# EAGLE board aleph-interface121120 (EAGLE 5.11)
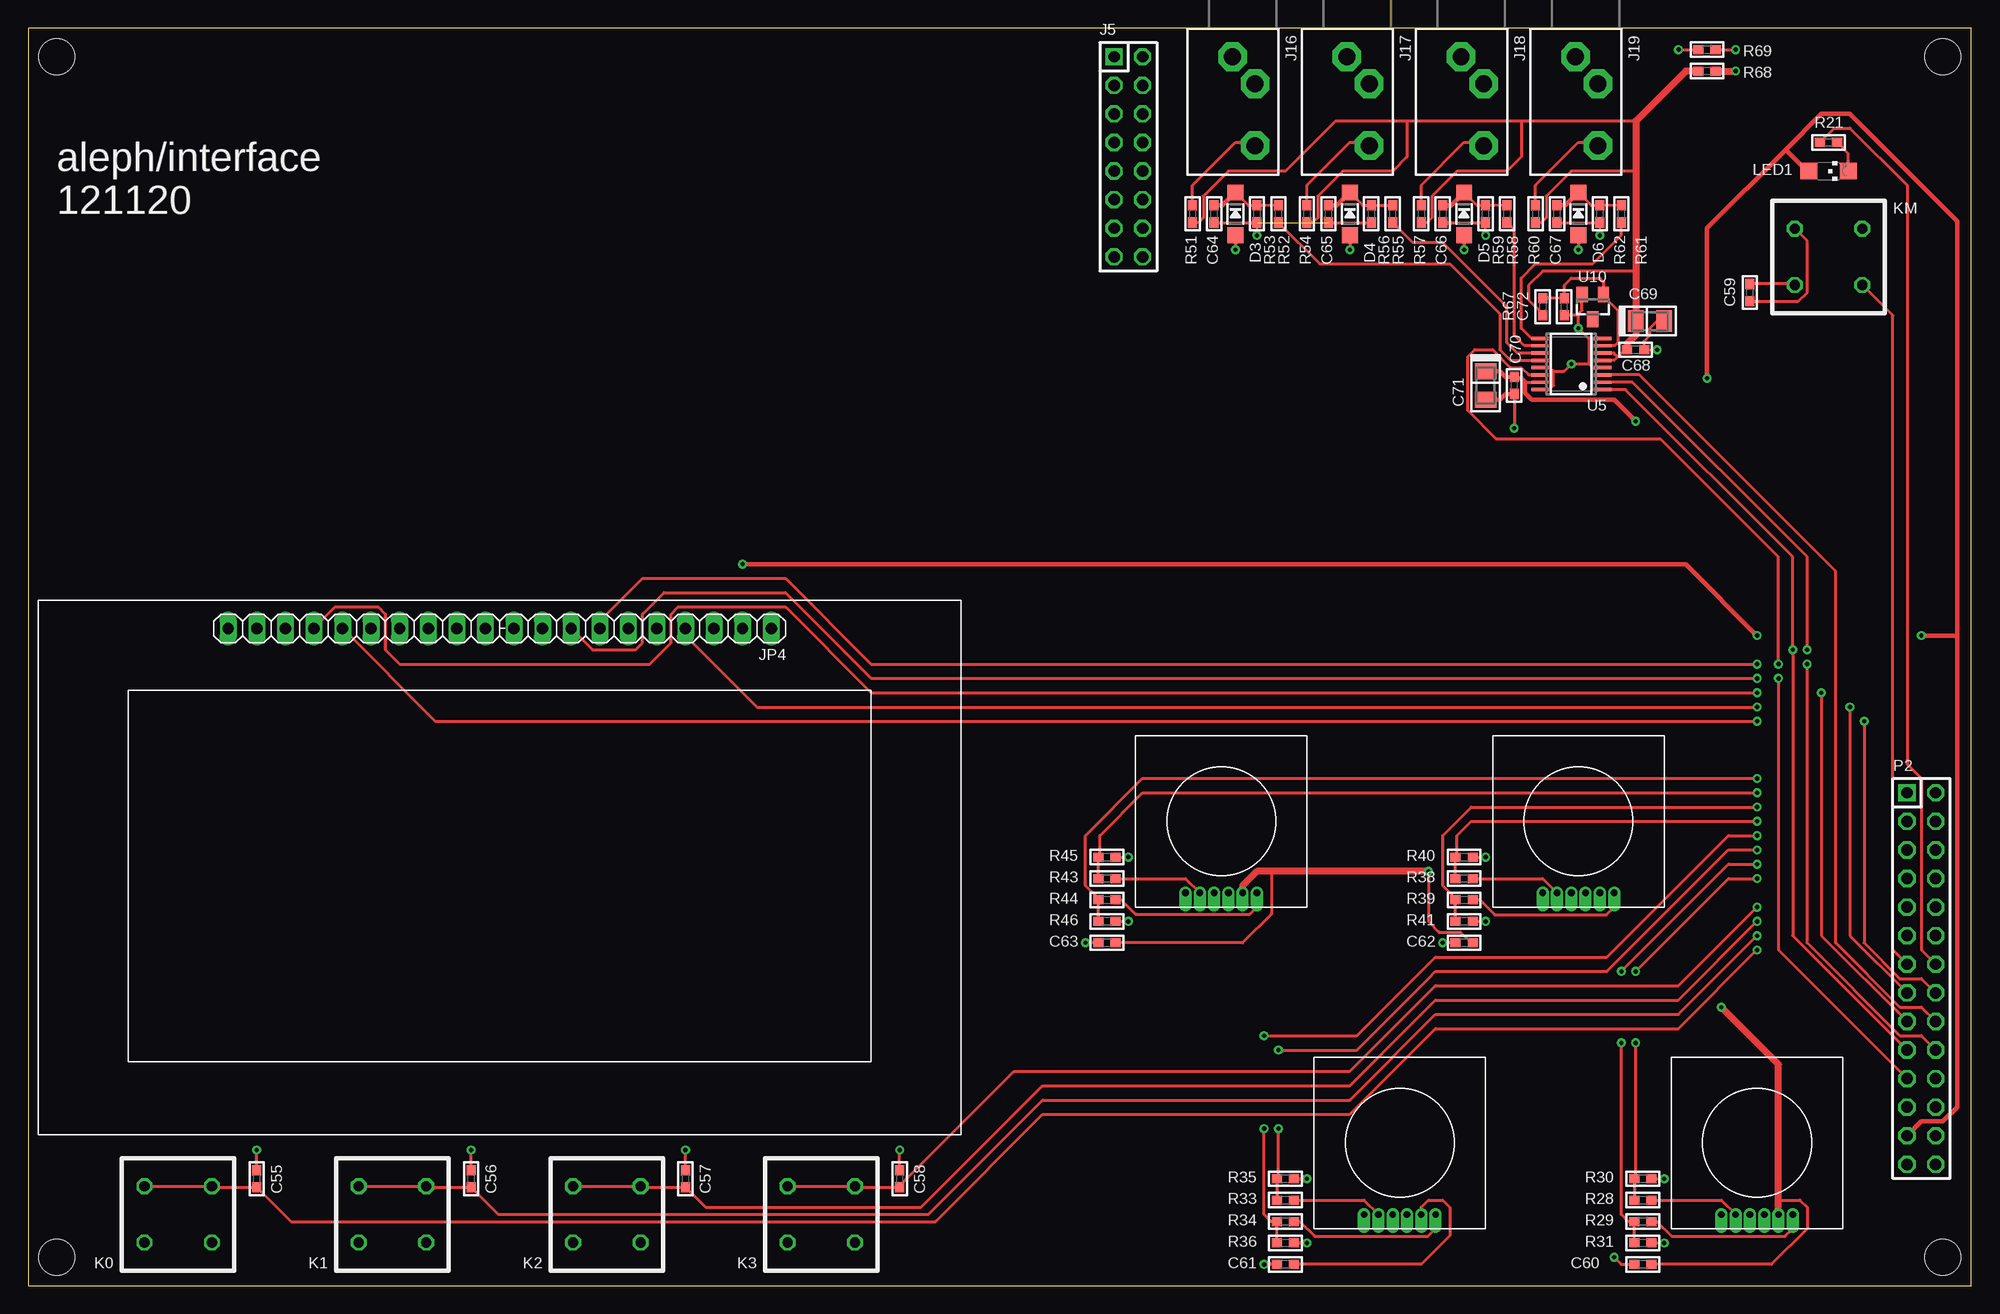
[diagram p0: board, top side]
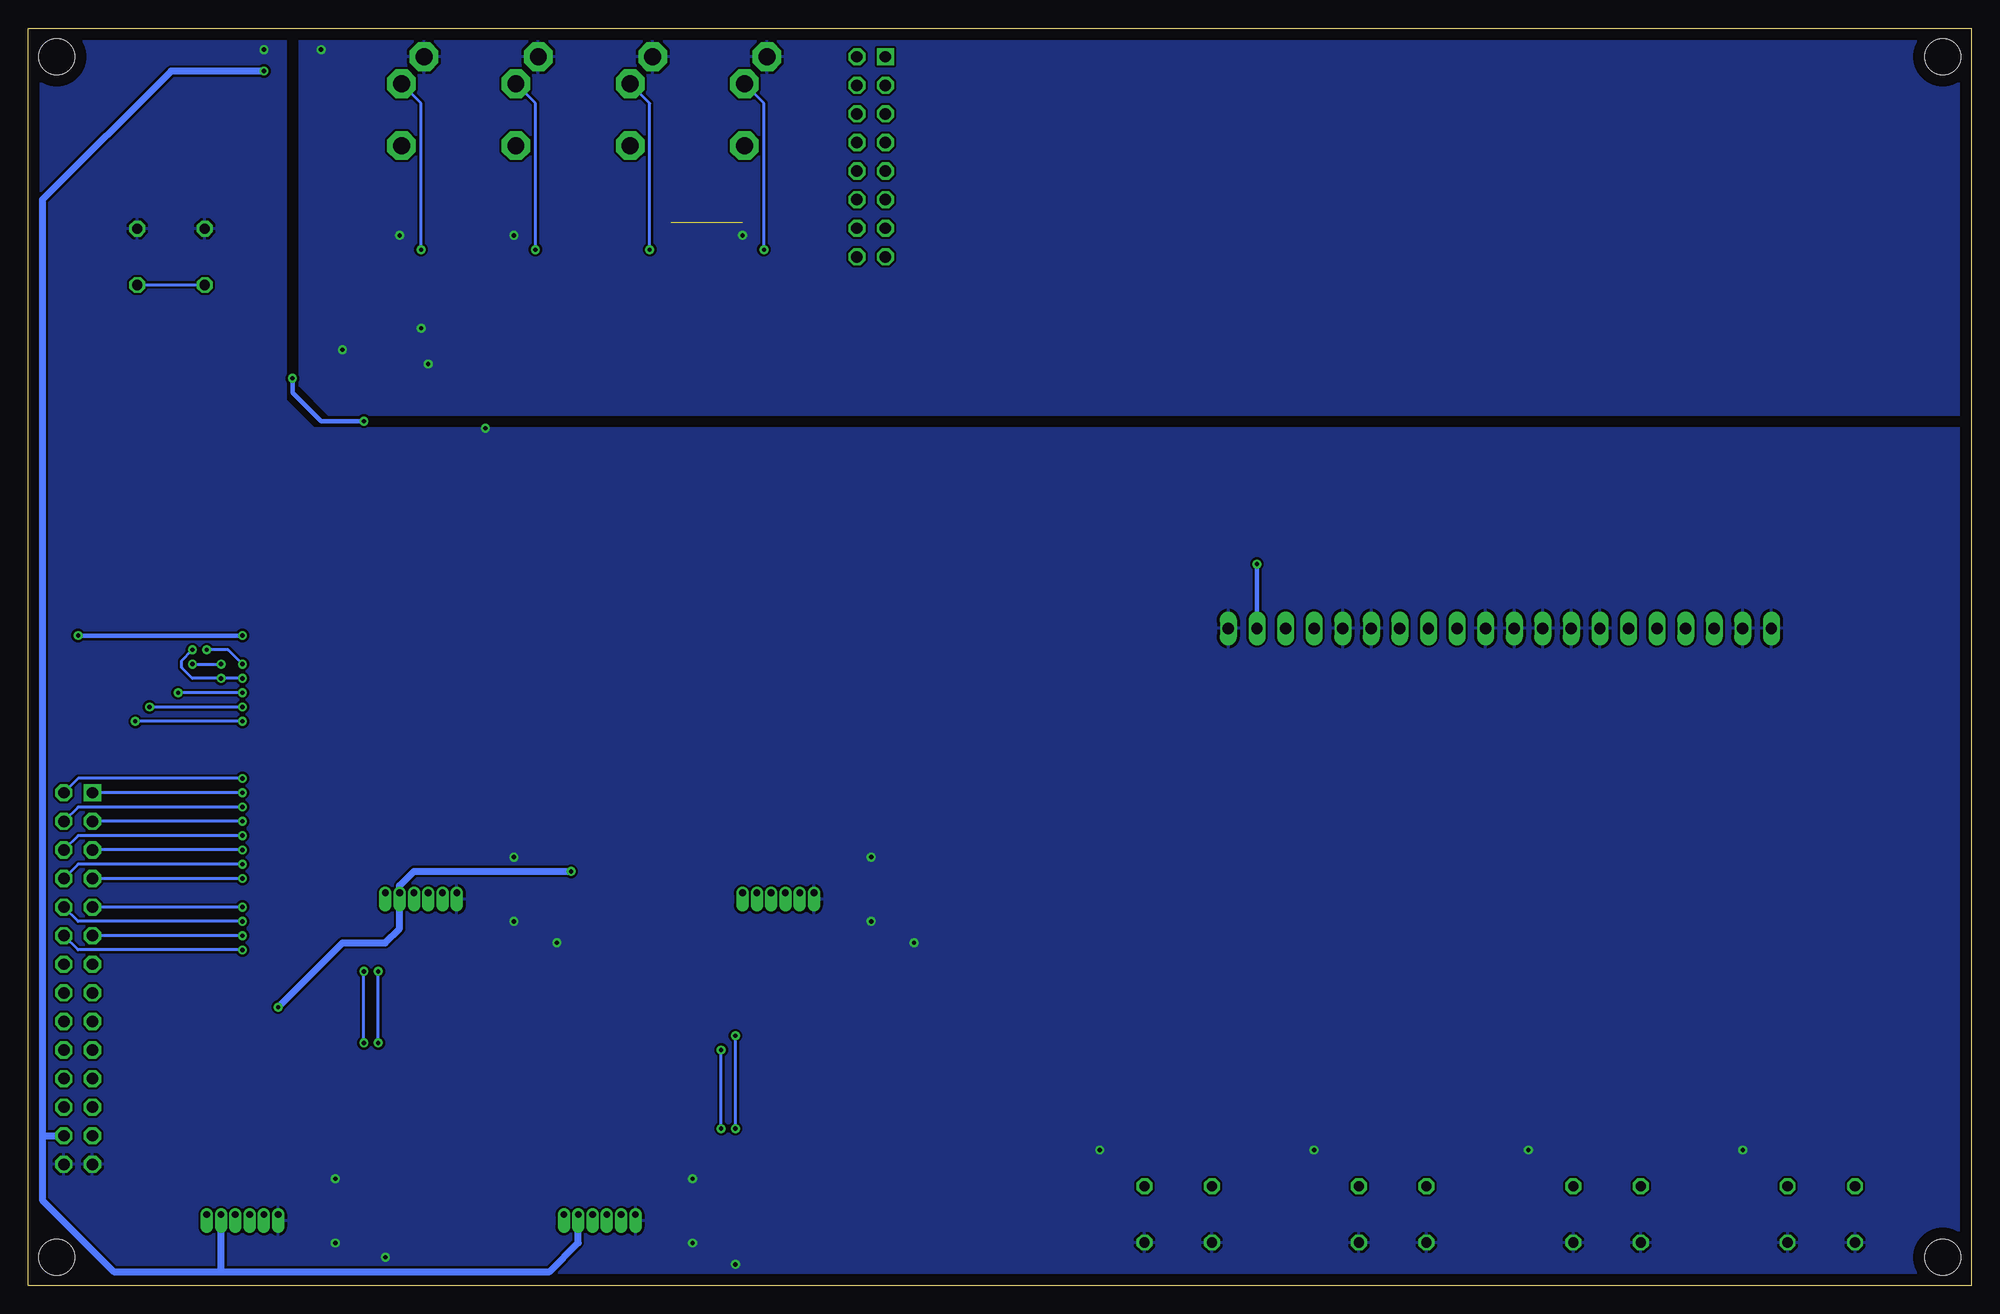
[diagram p1: board, bottom side, seen from below]

Size 172.72 x 111.76 mm. Coordinates in mm from the lower left corner, seen from the top.
Outline: 0,0 172.72,0 172.72,111.76 0,111.76 0,0
Copper layers (1*16): Top 0.035mm / dielectric 1.5mm / Bottom 0.035mm
Design rules "default": minimum track width 10mil, minimum drill 24mil, track to track 8mil, track to pad 8mil, pad to pad 8mil, via to via 8mil, smd to smd 8mil, copper to edge 40mil, drill to drill 8mil, minimum pad ring 10mil, minimum via ring 8mil, stop-mask expansion 4mil, vias tented up to drill 0mil, thermal gap 10mil
Holes 3.2 mm at 2.54,2.54 2.54,109.22 170.18,109.22 170.18,2.54

## Footprints (pad centres in the part's own frame; a part is rotated, then mirrored left to right if it is on the bottom)
C0603 = smd 0.9 x 0.8: 1 -0.762,0; 2 0.762,0
C1206/T = smd 1.4 x 1.9: + 1.27,0; - -1.27,0
SOD123 = smd 1.4 x 1.4: A 1.905,0; C -1.905,0
DIL-100-2X08 = drill 1.016 square: 1 -8.89,-1.27 | drill 1.016 octagon: 2 -8.89,1.27; 3 -6.35,-1.27; 4 -6.35,1.27; 5 -3.81,-1.27; 6 -3.81,1.27; 7 -1.27,-1.27; 8 -1.27,1.27; 9 1.27,-1.27; 10 1.27,1.27; 11 3.81,-1.27; 12 3.81,1.27; 13 6.35,-1.27; 14 6.35,1.27; 15 8.89,-1.27; 16 8.89,1.27
SJ1-3533NG = drill 1.5 pad 2.54 octagon: 1 0,-0.9; 2 2.4,1.1; 3 7.9,1.1
1X20 = drill 1.016 long: 1 -24.13,0; 2 -21.59,0; 3 -19.05,0; 4 -16.51,0; 5 -13.97,0; 6 -11.43,0; 7 -8.89,0; 8 -6.35,0; 9 -3.81,0; 10 -1.27,0; 11 1.27,0; 12 3.81,0; 13 6.35,0; 14 8.89,0; 15 11.43,0; 16 13.97,0; 17 16.51,0; 18 19.05,0; 19 21.59,0; 20 24.13,0
PVA1 = drill 0.9 octagon: 1 -3,-2.5; 2 -3,2.5; 3 3,2.5; 4 3,-2.5
CHIPLED_1206 = smd 1.5 x 1.5: A 0,-1.75; C 0,1.75
DIL-100-2X14 = drill 1.016 square: 1 -16.51,-1.27 | drill 1.016 octagon: 2 -16.51,1.27; 3 -13.97,-1.27; 4 -13.97,1.27; 5 -11.43,-1.27; 6 -11.43,1.27; 7 -8.89,-1.27; 8 -8.89,1.27; 9 -6.35,-1.27; 10 -6.35,1.27; 11 -3.81,-1.27; 12 -3.81,1.27; 13 -1.27,-1.27; 14 -1.27,1.27; 15 1.27,-1.27; 16 1.27,1.27; 17 3.81,-1.27; 18 3.81,1.27; 19 6.35,-1.27; 20 6.35,1.27; 21 8.89,-1.27; 22 8.89,1.27; 23 11.43,-1.27; 24 11.43,1.27; 25 13.97,-1.27; 26 13.97,1.27; 27 16.51,-1.27; 28 16.51,1.27
R0603 = smd 0.9 x 0.8: 1 -0.762,0; 2 0.762,0
TSSOP16 = smd 0.3 x 1.5: 1 -2.275,-2.8; 2 -1.625,-2.8; 3 -0.975,-2.8; 4 -0.325,-2.8; 5 0.325,-2.8; 6 0.975,-2.8; 7 1.625,-2.8; 8 2.275,-2.8; 9 2.275,2.8; 10 1.625,2.8; 11 0.975,2.8; 12 0.325,2.8; 13 -0.325,2.8; 14 -0.975,2.8; 15 -1.625,2.8; 16 -2.275,2.8
SOT23 = smd 1 x 1.4: 1 -0.95,-1.1; 2 0.95,-1.1; 3 0,1.1
BOURNS-EM14 = drill 0.6 pad 0.813 offset: P$1 -3.175,-6.35; P$2 -1.905,-6.35; P$3 -0.635,-6.35; P$4 0.635,-6.35; P$5 1.905,-6.35; P$6 3.175,-6.35

## Placement (x,y rotation side)
C55  100n  [C0603]  20.32,9.53 270 top
C56  100n  [C0603]  39.37,9.53 270 top
C57  100n  [C0603]  58.42,9.53 270 top
C58  100n  [C0603]  77.47,9.53 270 top
C59  100n  [C0603]  153.03,88.27 90 top
C60  100n  [C0603]  143.51,1.91 0 top
C61  100n  [C0603]  111.76,1.91 0 top
C62  100n  [C0603]  127.64,30.48 0 top
C63  100n  [C0603]  95.89,30.48 0 top
C64  10n  [C0603]  105.41,95.25 270 top
C65  10n  [C0603]  115.57,95.25 270 top
C66  10n  [C0603]  125.73,95.25 270 top
C67  10n  [C0603]  135.89,95.25 270 top
C68  100n  [C0603]  142.88,83.19 180 top
C69  10u  [C1206/T]  144.15,85.72 180 top
C70  100n  [C0603]  132.08,80.01 90 top
C71  10u  [C1206/T]  129.54,80.01 90 top
C72  100n  [C0603]  136.53,87 90 top
D3  1N4148W-7  [SOD123]  107.31,95.25 270 top
D4  1N4148W-7  [SOD123]  117.47,95.25 270 top
D5  1N4148W-7  [SOD123]  127.64,95.25 270 top
D6  1N4148W-7  [SOD123]  137.79,95.25 270 top
J5  F-2X08-DIL-100  [DIL-100-2X08]  97.79,100.33 270 top
J16  SJ1-3533NG  [SJ1-3533NG]  107.95,109.22 270 top
J17  SJ1-3533NG  [SJ1-3533NG]  118.11,109.22 270 top
J18  SJ1-3533NG  [SJ1-3533NG]  128.27,109.22 270 top
J19  SJ1-3533NG  [SJ1-3533NG]  138.43,109.22 270 top
JP4  OLED  [1X20]  41.91,58.42 180 top
K0  PVA1  [PVA1]  13.34,6.35 180 top
K1  PVA1  [PVA1]  32.38,6.35 180 top
K2  PVA1  [PVA1]  51.44,6.35 180 top
K3  PVA1  [PVA1]  70.48,6.35 180 top
KM  PVA1  [PVA1]  160.02,91.44 0 top
LED1  [CHIPLED_1206]  160.02,99.06 270 top
P2  M-2X14-DIL-100  [DIL-100-2X14]  168.28,27.3 270 top
R21  150  [R0603]  160.02,101.6 0 top
R28  470  [R0603]  143.51,7.62 180 top
R29  470  [R0603]  143.51,5.71 180 top
R30  910  [R0603]  143.51,9.53 180 top
R31  910  [R0603]  143.51,3.81 180 top
R33  470  [R0603]  111.76,7.62 180 top
R34  470  [R0603]  111.76,5.71 180 top
R35  910  [R0603]  111.76,9.53 180 top
R36  910  [R0603]  111.76,3.81 180 top
R38  470  [R0603]  127.64,36.2 180 top
R39  470  [R0603]  127.64,34.29 180 top
R40  910  [R0603]  127.64,38.1 180 top
R41  910  [R0603]  127.64,32.38 180 top
R43  470  [R0603]  95.89,36.2 180 top
R44  470  [R0603]  95.89,34.29 180 top
R45  910  [R0603]  95.89,38.1 180 top
R46  910  [R0603]  95.89,32.38 180 top
R51  10k  [R0603]  103.5,95.25 270 top
R52  10k  [R0603]  111.12,95.25 90 top
R53  10k  [R0603]  109.22,95.25 270 top
R54  10k  [R0603]  113.67,95.25 270 top
R55  10k  [R0603]  121.28,95.25 90 top
R56  10k  [R0603]  119.38,95.25 270 top
R57  10k  [R0603]  123.83,95.25 270 top
R58  10k  [R0603]  131.44,95.25 90 top
R59  10k  [R0603]  129.54,95.25 270 top
R60  10k  [R0603]  133.99,95.25 270 top
R61  10k  [R0603]  141.6,95.25 90 top
R62  10k  [R0603]  139.7,95.25 270 top
R67  1k  [R0603]  134.62,87 90 top
R68  0  [R0603]  149.22,107.95 0 top
R69  0  [R0603]  149.22,109.86 0 top
U5  AD7923  [TSSOP16]  137.16,81.92 90 top
U10  LM4040M3  [SOT23]  139.06,87 180 top
U$2  BOURNS-EM14  [BOURNS-EM14]  153.67,12.7 0 top
U$3  BOURNS-EM14  [BOURNS-EM14]  121.92,12.7 0 top
U$4  BOURNS-EM14  [BOURNS-EM14]  137.8,41.28 0 top
U$5  BOURNS-EM14  [BOURNS-EM14]  106.05,41.27 0 top
U$10  NHD-2.7  [NHD-2.7]  41.91,58.42 0 top

## Library data of the parts
C55-C72 R21 R28-R31 R33-R36 R38-R41 R43-R46 R51-R62 R67-R69 = rc-master-smd
D3-D6 U10 = diode
J5 P2 = con-headers-jp
J16-J19 = con-cuistack
JP4 = pinhead
K0 K1-K3 KM U5 U$2-U$5 U$10 = monome-inc
LED1 = led

## Nets
+3V3: C70.2 C71.+ JP4.2 LED1.A P2.25 U5.15
+5V: C60.2 C61.2 C62.2 C63.2 P2.26 R68.2 U$2.P$5 U$3.P$5 U$4.P$5 U$5.P$5
+5VA: C68.2 C69.+ R51.2 R54.2 R57.2 R60.2 R67.1 R68.1 U5.5 U5.6
AGND: C64.2 C65.2 C66.2 C67.2 C68.1 C69.- C72.1 J16.1 J17.1 J18.1 J19.1 R53.2 R56.2 R59.2 R62.2 R69.1 U5.4 U5.8 U5.13 U5.16 U10.2
ENC0A^: P2.7 R28.2 R30.2
ENC0B^: P2.8 R29.2 R31.2
ENC1A^: P2.5 R33.2 R35.2
ENC1B^: P2.6 R34.2 R36.2
ENC2A^: P2.3 R38.2 R40.2
ENC2B^: P2.4 R39.2 R41.2
ENC3A^: P2.1 R43.2 R45.2
ENC3B^: P2.2 R44.2 R46.2
GND: C55.1 C56.1 C57.1 C58.1 C59.1 C60.1 C61.1 C62.1 C63.1 C70.1 C71.- JP4.1 JP4.5 JP4.6 JP4.10 JP4.11 JP4.12 JP4.13 JP4.14 JP4.19 JP4.20 K0.2 K0.3 K1.2 K1.3 K2.2 K2.3 K3.2 K3.3 KM.2 KM.3 P2.27 P2.28 R30.1 R31.1 R35.1 R36.1 R40.1 R41.1 R45.1 R46.1 R69.2 U$2.P$1 U$3.P$1 U$4.P$1 U$5.P$1
KEY0^: C55.2 K0.1 K0.4 P2.12
KEY1^: C56.2 K1.1 K1.4 P2.11
KEY2^: C57.2 K2.1 K2.4 P2.10
KEY3^: C58.2 K3.1 K3.4 P2.9
MODE-KEY^: C59.2 KM.1 KM.4 P2.13
MODE-LED^: P2.14 R21.1
N$2: R43.1 U$5.P$2
N$8: R38.1 U$4.P$2
N$10: R33.1 U$3.P$2
N$11: R28.1 U$2.P$2
N$20: LED1.C R21.2
N$21: R29.1 U$2.P$6
N$23: R34.1 U$3.P$6
N$27: R39.1 U$4.P$6
N$30: R44.1 U$5.P$6
N$33: J18.3 R57.1
N$34: D3.A J16.2
N$39: C64.1 D3.C R52.2 R53.1
N$40: R52.1 U5.12
N$41: J17.3 R54.1
N$42: D4.A J17.2
N$43: C65.1 D4.C R55.2 R56.1
N$46: R55.1 U5.11
N$47: J16.3 R51.1
N$48: D5.A J18.2
N$49: C66.1 D5.C R58.2 R59.1
N$50: R58.1 U5.10
N$51: J19.3 R60.1
N$52: D6.A J19.2
N$53: C67.1 D6.C R61.2 R62.1
N$54: R61.1 U5.9
N$58: C72.2 R67.2 U5.7 U10.1
OLED-DC^: JP4.4 P2.15
OLED-RES^: JP4.16 P2.16
SPI1-CS0^: JP4.17 P2.17
SPI1-CS1^: P2.18 U5.3
SPI1-MISO^: P2.20 U5.14
SPI1-MOSI^: JP4.8 P2.21 U5.2
SPI1-SCK^: JP4.7 P2.19 U5.1

## Tracks (layer width: path | path; a pad name or v marks a point on that pad's centre or on a via)
+3V3  (via drill 0.38)
  Top 0.254: U5.15 133.07,80.29 133.03,80.25 | 132.21,80.64 C70.2 | 158.12,99.06 LED1.A
  Top 0.406: 133.07,80.29 132.72,80.64 132.21,80.64 | C70.2 131.32,80.77 130.81,81.28 C71.+ | P2.25 168.28,14.61 170.18,14.61 171.45,15.88 171.45,57.78 | 171.45,57.78 171.45,94.61 161.93,104.14 159.38,104.14 156.21,100.97 | 156.21,100.97 158.12,99.06 | 156.21,100.97 149.22,93.98 v149.22,80.64 | v142.88,76.83 140.97,78.74 133.67,78.74 133.03,79.38 133.03,80.25 | v63.5,64.14 147.32,64.14 v153.67,57.78 | 171.45,57.78 v168.28,57.78
  Bottom 0.406: v149.22,80.64 149.22,79.38 146.69,76.83 v142.88,76.83 | v63.5,64.14 JP4.2 | v168.28,57.78 v153.67,57.78
+5V  (via drill 0.38)
  Top 0.254: C63.2 107.95,30.48 110.49,33.02 110.49,36.83 | C62.2 128.27,30.48 127.32,31.43 125.41,31.43 124.46,32.38 v124.46,36.83 | C61.2 123.83,1.91 126.36,4.45 126.36,6.99 125.73,7.62 124.46,7.62 123.83,6.99 U$3.P$5 | C60.2 154.94,1.91 158.12,5.08 158.12,6.99 157.48,7.62 155.57,7.62
  Top 0.61: v150.5,24.77 155.57,19.68 155.57,7.62 U$2.P$5 | U$5.P$5 107.95,35.56 109.22,36.83 110.49,36.83 v124.46,36.83 | R68.2 v151.76,107.95
  Bottom 0.61: 171.45,13.34 P2.26 | 171.45,13.34 171.45,7.62 165.1,1.27 155.57,1.27 | 155.57,1.27 126.36,1.27 123.83,3.81 U$3.P$5 | 155.57,1.27 U$2.P$5 | v150.5,24.77 144.78,30.48 140.97,30.48 139.7,31.75 U$4.P$5 139.7,35.56 138.43,36.83 v124.46,36.83 | 171.45,13.34 171.45,96.52 160.02,107.95 v151.76,107.95
+5VA
  Top 0.254: U5.5 140.98,82.24 141.29,82.55 | C68.2 141.92,83.19 141.29,82.55 | U5.6 140.95,82.89 141.29,82.55 | R51.2 104.01,94.49 104.46,94.93 104.46,96.84 106.68,99.06 111.76,99.06 116.2,103.5 122.56,103.5 | 132.72,103.5 122.56,103.5 | R54.2 114.17,94.49 114.62,94.93 114.62,96.84 116.84,99.06 121.28,99.06 122.56,100.33 122.56,103.5 | R57.2 124.33,94.49 124.78,94.93 124.78,96.84 127,99.06 131.44,99.06 132.72,100.33 132.72,103.5 | R60.2 134.49,94.49 134.94,94.93 134.94,96.84 137.16,99.06 142.88,99.06 | 142.88,103.5 132.72,103.5 | R67.1 134.62,86.36 133.35,87.63 133.35,88.9 134.62,90.17 142.88,90.17
  Top 0.61: C68.2 142.11,83.69 142.88,84.45 C69.+ 142.88,90.17 142.88,99.06 142.88,103.5 147.32,107.95 R68.1
AGND  (via drill 0.38)  (1 unrouted)
  Top 0.203: R53.2 v109.22,93.34 | R62.2 v139.7,93.34 | R59.2 v129.54,93.34
  Top 0.254: C69.- 144.78,85.72 144.15,85.09 144.15,84.45 143.64,83.95 C68.1 | C68.1 143.51,83.19 | U5.4 139.07,81.59 138.75,81.92 | 139.12,84.19 U5.8 138.69,84.19 | U5.13 135.26,81.59 135.57,81.28 | 135.57,81.28 135.57,80.01 135.2,79.64 U5.16 | 138.75,81.92 v137.16,81.92 136.53,81.28 135.57,81.28 | v146.69,109.86 R69.1 | 138.69,84.19 v137.79,85.09 137.79,86.36 | U10.2 138.12,86.68 137.79,86.36 | C72.1 137.67,86.23 137.79,86.36 | 138.75,81.92 138.75,84.14 138.69,84.19 | C68.1 v144.78,83.19 | C64.2 R53.2 | C65.2 R56.2 | C66.2 R59.2 | C67.2 R62.2
  pour Bottom: 148.59,111.76 148.59,80.01 146.05,77.47 0,77.47 0,111.76
ENC0A^  (via drill 0.38)
  Top 0.254: R28.2 R30.2 142.88,9.53 v142.88,21.59 | v142.88,27.94 151.13,36.2 v153.67,36.2
  Bottom 0.254: v142.88,21.59 v142.88,27.94 | v153.67,36.2 P2.7
ENC0B^  (via drill 0.38)
  Top 0.203: R29.2 142.75,5.84
  Top 0.254: 142.88,3.81 R31.2 R29.2 | 142.75,5.84 142.88,5.71 142.24,5.71 141.6,6.35 v141.6,21.59 | v141.6,27.94 151.13,37.47 v153.67,37.47
  Bottom 0.254: v141.6,21.59 v141.6,27.94 | v153.67,37.47 168.28,37.47 P2.8
ENC1A^  (via drill 0.38)
  Top 0.254: R33.2 R35.2 111.12,9.53 v111.12,13.97 | v111.12,20.95 118.11,20.95 124.46,27.3 125.09,27.94 140.34,27.94 151.13,38.73 v153.67,38.73
  Bottom 0.254: v111.12,13.97 v111.12,20.95 | v153.67,38.73 P2.5
ENC1B^  (via drill 0.38)
  Top 0.254: 111.12,3.81 R36.2 R34.2 110.49,5.71 109.86,6.35 v109.86,13.97 | v109.86,22.23 118.11,22.23 125.09,29.21 140.34,29.21 151.13,40.01 v153.67,40.01
  Bottom 0.254: v153.67,40.01 168.28,40.01 P2.6 | v109.86,13.97 v109.86,22.23
ENC2A^  (via drill 0.38)
  Top 0.254: R38.2 R40.2 127,38.23 | 127,38.23 127,38.1 | 127,38.23 127,40.01 128.27,41.27 v153.67,41.27
  Bottom 0.254: v153.67,41.27 P2.3
ENC2B^  (via drill 0.38)
  Top 0.254: R41.2 R39.2 127,34.29 125.73,35.56 125.73,40.01 128.27,42.55 v153.67,42.55
  Bottom 0.254: v153.67,42.55 168.28,42.55 P2.4
ENC3A^  (via drill 0.38)
  Top 0.254: R43.2 R45.2 95.25,38.1 95.25,40.01 99.06,43.81 v153.67,43.81
  Bottom 0.254: v153.67,43.81 P2.1
ENC3B^  (via drill 0.38)
  Top 0.254: R46.2 R44.2 95.25,34.29 93.98,35.56 93.98,40.01 99.06,45.09 v153.67,45.09
  Bottom 0.254: v153.67,45.09 168.28,45.09 P2.2
GND  (via drill 0.38)
  Top 0.254: 144.27,3.68 R31.1 v145.41,3.81 | R69.2 v151.76,109.86 | C59.1 157.35,87.5 158.12,88.27 158.12,92.84 KM.2 | C58.1 v77.47,12.06 | C57.1 v58.42,12.06 | C56.1 v39.37,12.06 | C55.1 v20.32,12.06 | C62.1 v125.73,30.48 | R41.1 v129.54,32.38 | R40.1 v129.54,38.1 | C63.1 v93.98,30.48 | R46.1 v97.79,32.38 | R45.1 v97.79,38.1 | C61.1 v109.86,1.91 | R36.1 v113.67,3.81 | R35.1 v113.67,9.53 | C60.1 141.6,1.91 v140.97,2.54 | R30.1 v145.41,9.53 | C70.1 v132.08,76.2
  Top 0.406: C70.1 131.32,79.25 130.81,78.74 C71.-
  pour Bottom: 0,76.2 0,0 172.72,0 172.72,111.76 149.86,111.76 149.86,78.74 147.32,76.2
KEY0^  (via drill 0.38)
  Top 0.254: K0.4 K0.1 | K0.1 16.38,8.89 | v153.67,29.84 146.69,22.86 125.09,22.86 117.47,15.24 90.17,15.24 80.64,5.71 23.37,5.71 C55.2 16.42,8.76 K0.1
  Bottom 0.254: P2.12 168.28,29.84 v153.67,29.84
KEY1^  (via drill 0.38)
  Top 0.254: K1.4 K1.1 | K1.1 35.42,8.89 | C56.2 39.37,8.89 | v153.67,31.11 146.69,24.13 125.09,24.13 117.47,16.51 90.17,16.51 80.01,6.35 41.78,6.35 C56.2 | C56.2 35.47,8.76 K1.1
  Bottom 0.254: v153.67,31.11 P2.11
KEY2^  (via drill 0.38)
  Top 0.254: K2.4 K2.1 54.52,8.76 C57.2 60.2,6.99 79.38,6.99 90.17,17.78 117.47,17.78 125.09,25.4 146.69,25.4 v153.67,32.38
  Bottom 0.254: P2.10 168.28,32.38 v153.67,32.38
KEY3^  (via drill 0.38)
  Top 0.254: K3.4 K3.1 | K3.1 73.53,8.89 | v153.67,33.66 146.69,26.67 125.09,26.67 117.47,19.05 87.63,19.05 77.47,8.89 C58.2 73.57,8.76 K3.1
  Bottom 0.254: v153.67,33.66 P2.9
MODE-KEY^
  Top 0.254: KM.4 165.74,86.22 165.74,29.84 P2.13 | C59.2 156.93,89.03 KM.1
  Bottom 0.254: 156.93,89.03 KM.1 KM.4
MODE-LED^
  Top 0.152: R21.1 159.38,101.6
  Top 0.254: R21.1 160.53,102.87 161.93,102.87 167,97.79 167,46.35 168.28,45.09 168.28,29.84 P2.14
N$2
  Top 0.254: R43.1 102.87,36.2 U$5.P$2
N$8
  Top 0.254: R38.1 134.62,36.2 U$4.P$2
N$10
  Top 0.254: R33.1 118.75,7.62 U$3.P$2
N$11
  Top 0.254: R28.1 150.5,7.62 U$2.P$2
N$20
  Top 0.254: LED1.C 161.77,100.61 R21.2
N$21
  Top 0.254: R29.1 144.78,5.71 146.1,4.39 156.16,4.39 156.84,5.08 U$2.P$6
N$23
  Top 0.254: R34.1 113.03,5.71 114.36,4.39 124.41,4.39 125.09,5.08 U$3.P$6
N$27  (via drill 0.38)
  Top 0.254: v140.97,34.92 140.97,33.66 140.28,32.97 130.36,32.97 129.03,34.29 R39.1
  Bottom 0.254: v140.97,34.92
N$30
  Top 0.254: R44.1 97.16,34.29 98.42,33.02 108.58,33.02 109.22,33.66 U$5.P$6
N$33
  Top 0.254: J18.3 129.13,101.32 128.91,101.6 127.64,101.6 123.83,97.79 R57.1
N$34  (via drill 0.38)
  Top 0.254: D3.A v107.31,92.08
  Bottom 0.254: v107.31,92.08 107.31,105.08 J16.2
N$39
  Top 0.203: 111.25,96.01 R52.2 R53.1
  Top 0.254: R53.1 108.46,96.01 D3.C
  Top 0.406: C64.1 106.17,96.01 D3.C
N$40
  Top 0.254: U5.12 131.75,82.24 130.81,83.19 130.81,86.36 126.36,90.81 114.81,90.81 R52.1
N$41
  Top 0.254: J17.3 118.97,101.32 118.75,101.6 117.47,101.6 113.67,97.79 R54.1
N$42  (via drill 0.38)
  Top 0.254: D4.A v117.47,92.08
  Bottom 0.254: v117.47,92.08 117.47,105.08 J17.2
N$43
  Top 0.203: R55.2 R56.1
  Top 0.254: R55.2 118.62,96.01 D4.C
  Top 0.406: C65.1 116.33,96.01 D4.C
N$46
  Top 0.254: U5.11 132.38,82.89 131.44,83.82 131.44,87 125.73,92.71 123.06,92.71 R55.1
N$47
  Top 0.254: J16.3 108.81,101.32 108.58,101.6 107.31,101.6 103.5,97.79 R51.1
N$48  (via drill 0.38)
  Top 0.254: D5.A v127.64,92.08
  Bottom 0.254: v127.64,92.08 127.64,105.08 J18.2
N$49
  Top 0.203: R59.1 R58.2
  Top 0.254: R59.1 128.78,96.01 D5.C
  Top 0.406: C66.1 126.49,96.01 D5.C
N$50
  Top 0.254: U5.10 133,83.54 132.08,84.45 132.08,93.85 R58.1
N$51
  Top 0.254: J19.3 139.29,101.32 139.06,101.6 137.79,101.6 133.99,97.79 R60.1
N$52  (via drill 0.38)
  Top 0.254: D6.A v137.79,92.08
  Bottom 0.254: v137.79,92.08 137.79,105.08 J19.2
N$53
  Top 0.203: R62.1 R61.2
  Top 0.254: R62.1 138.94,96.01 D6.C
  Top 0.406: C67.1 136.65,96.01 D6.C
N$54
  Top 0.254: R61.1 141.6,93.34 139.06,90.81 133.99,90.81 132.72,89.53 132.72,85.09 133.62,84.19 U5.9
N$58
  Top 0.254: U5.7 141.01,83.54 141.29,83.82 141.29,86.68 140.01,87.95 U10.1 140.01,89.22 139.7,89.53 137.16,89.53 136.53,88.9 C72.2 R67.2
OLED-DC^  (via drill 0.38)
  Top 0.254: P2.15 161.93,31.11 v161.93,51.44 | v153.67,51.44 64.77,51.44 58.42,57.78 JP4.4
  Bottom 0.254: v153.67,51.44 v161.93,51.44
OLED-RES^  (via drill 0.38)
  Top 0.254: P2.16 168.28,27.3 166.37,27.3 163.19,30.48 v163.19,50.16 | v153.67,50.16 36.2,50.16 JP4.16
  Bottom 0.254: v153.67,50.16 v163.19,50.16
SPI1-CS0^  (via drill 0.38)
  Top 0.254: P2.17 159.38,31.11 v159.38,52.7 | v153.67,52.7 74.93,52.7 67.31,60.33 57.78,60.33 57.15,59.69 57.15,57.15 55.24,55.24 33.02,55.24 31.75,56.52 31.75,59.69 31.11,60.33 27.3,60.33 JP4.17
  Bottom 0.254: v153.67,52.7 v159.38,52.7
SPI1-CS1^
  Top 0.254: P2.18 168.28,24.77 166.37,24.77 160.66,30.48 160.66,63.5 143.22,80.94 U5.3
SPI1-MISO^  (via drill 0.38)
  Top 0.254: P2.20 168.28,22.23 166.37,22.23 158.12,30.48 v158.12,55.24 | U5.14 133.37,80.94 132.72,81.6 131.76,81.6 130.18,83.19 128.59,83.19 127.95,82.55 127.95,77.79 130.49,75.25 145.1,75.25 155.57,64.77 v155.57,55.24
  Bottom 0.254: v158.12,55.24 v155.57,55.24
SPI1-MOSI^  (via drill 0.38)
  Top 0.254: U5.2 142.59,80.29 158.12,64.77 v158.12,56.52 | P2.21 155.57,29.84 v155.57,53.98 | v153.67,53.98 74.93,53.98 67.31,61.59 56.52,61.59 54.61,59.69 54.61,57.15 53.98,56.52 50.16,56.52 JP4.8
  Bottom 0.254: v158.12,56.52 159.07,55.56 159.07,54.93 158.12,53.98 v155.57,53.98 v153.67,53.98
SPI1-SCK^  (via drill 0.38)
  Top 0.254: P2.19 156.84,31.11 v156.84,56.52 156.84,64.77 141.97,79.64 U5.1 | v153.67,55.24 74.93,55.24 67.31,62.87 54.61,62.87 50.8,59.05 JP4.7
  Bottom 0.254: v153.67,55.24 154.94,56.52 v156.84,56.52

## Text on the board
tPlace: aleph/interface | 121120